# Altium PCB Blinking_LED.PcbDoc
Units mil, origin at the board's own origin, x right, y up, seen from the top; angles counter-clockwise.
Board outline 1525 x 1300 mil, 2 copper layers (Top Layer, Bottom Layer); 12 components, 8 nets, 29 pads, 0 vias.
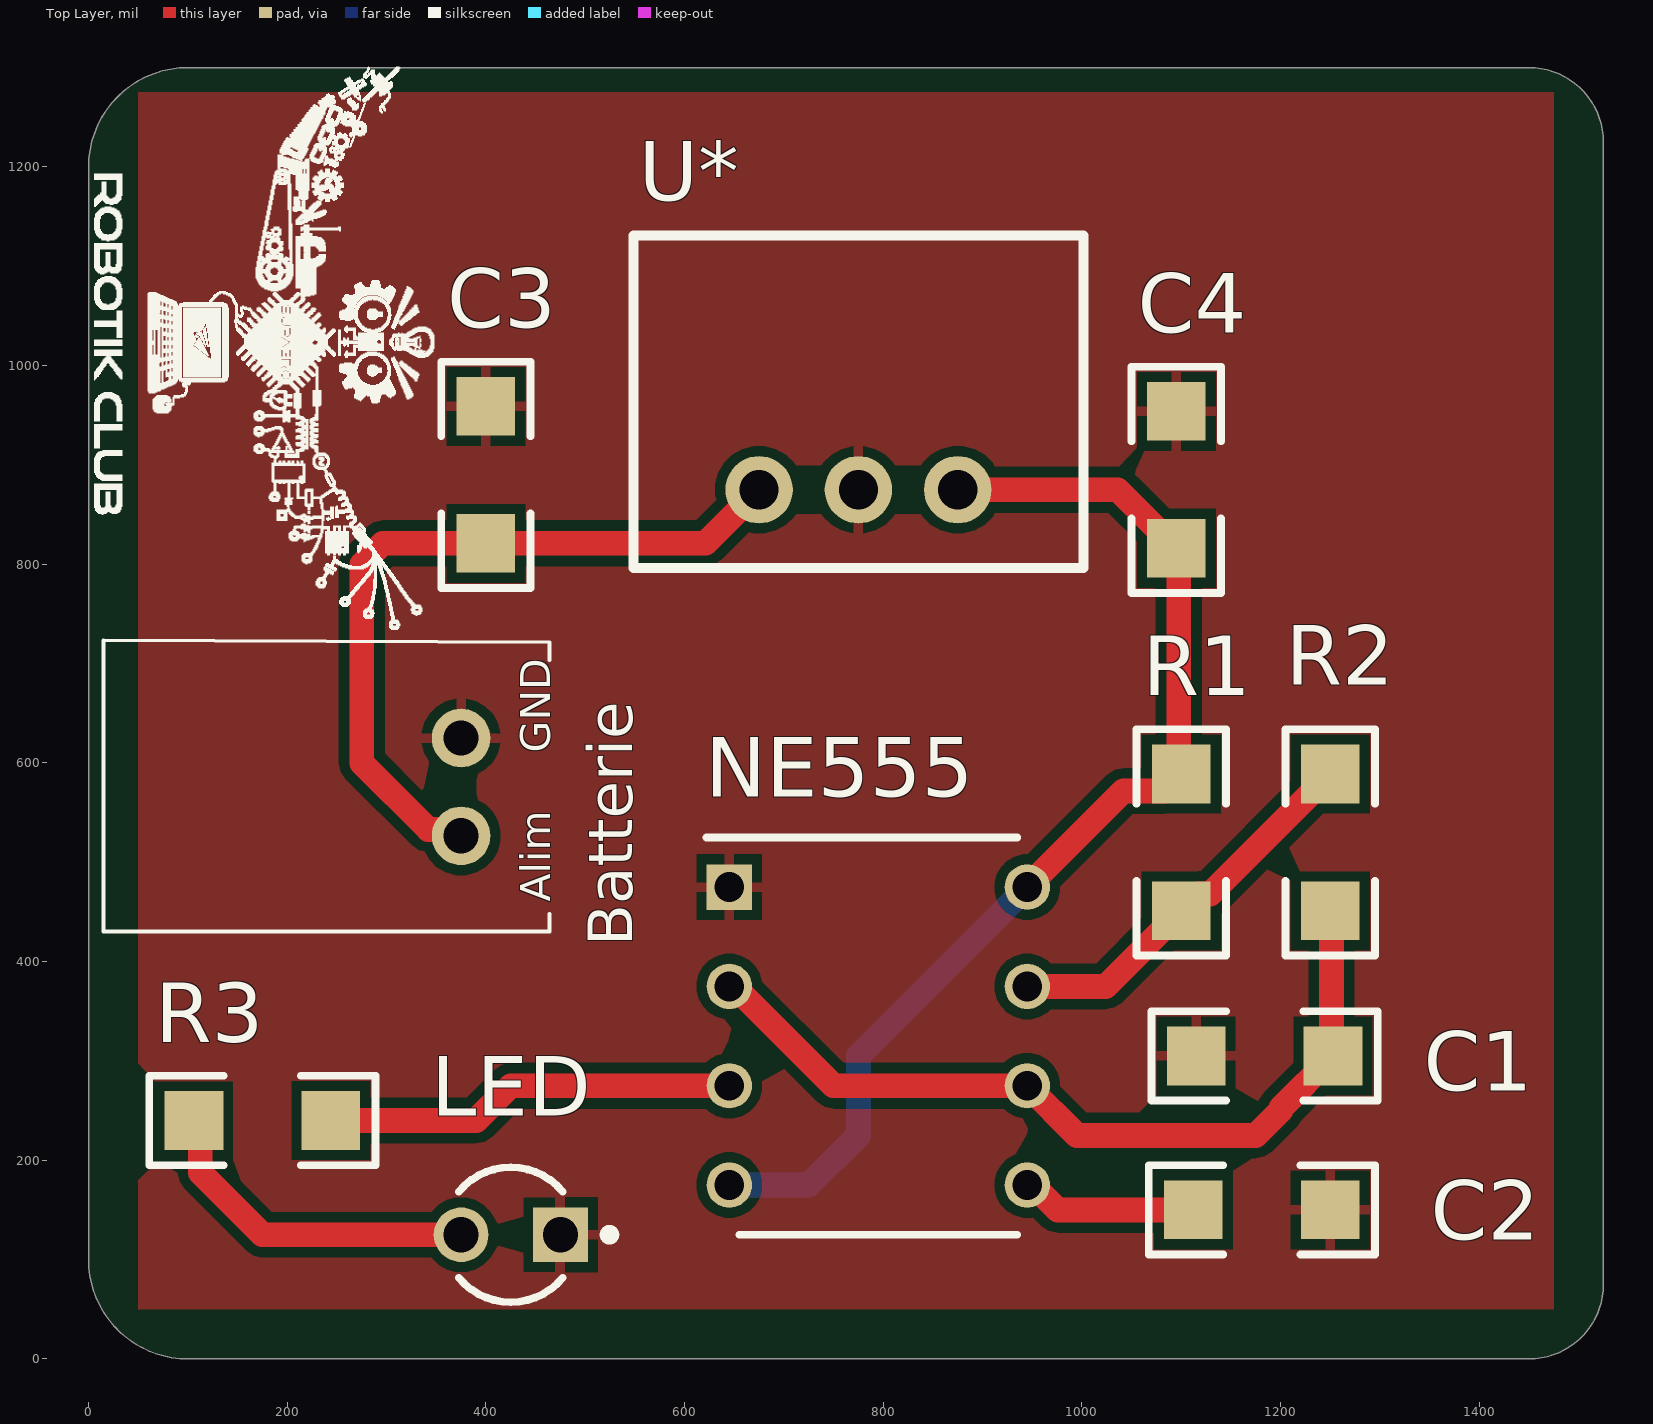
[diagram p0: Top Layer view]
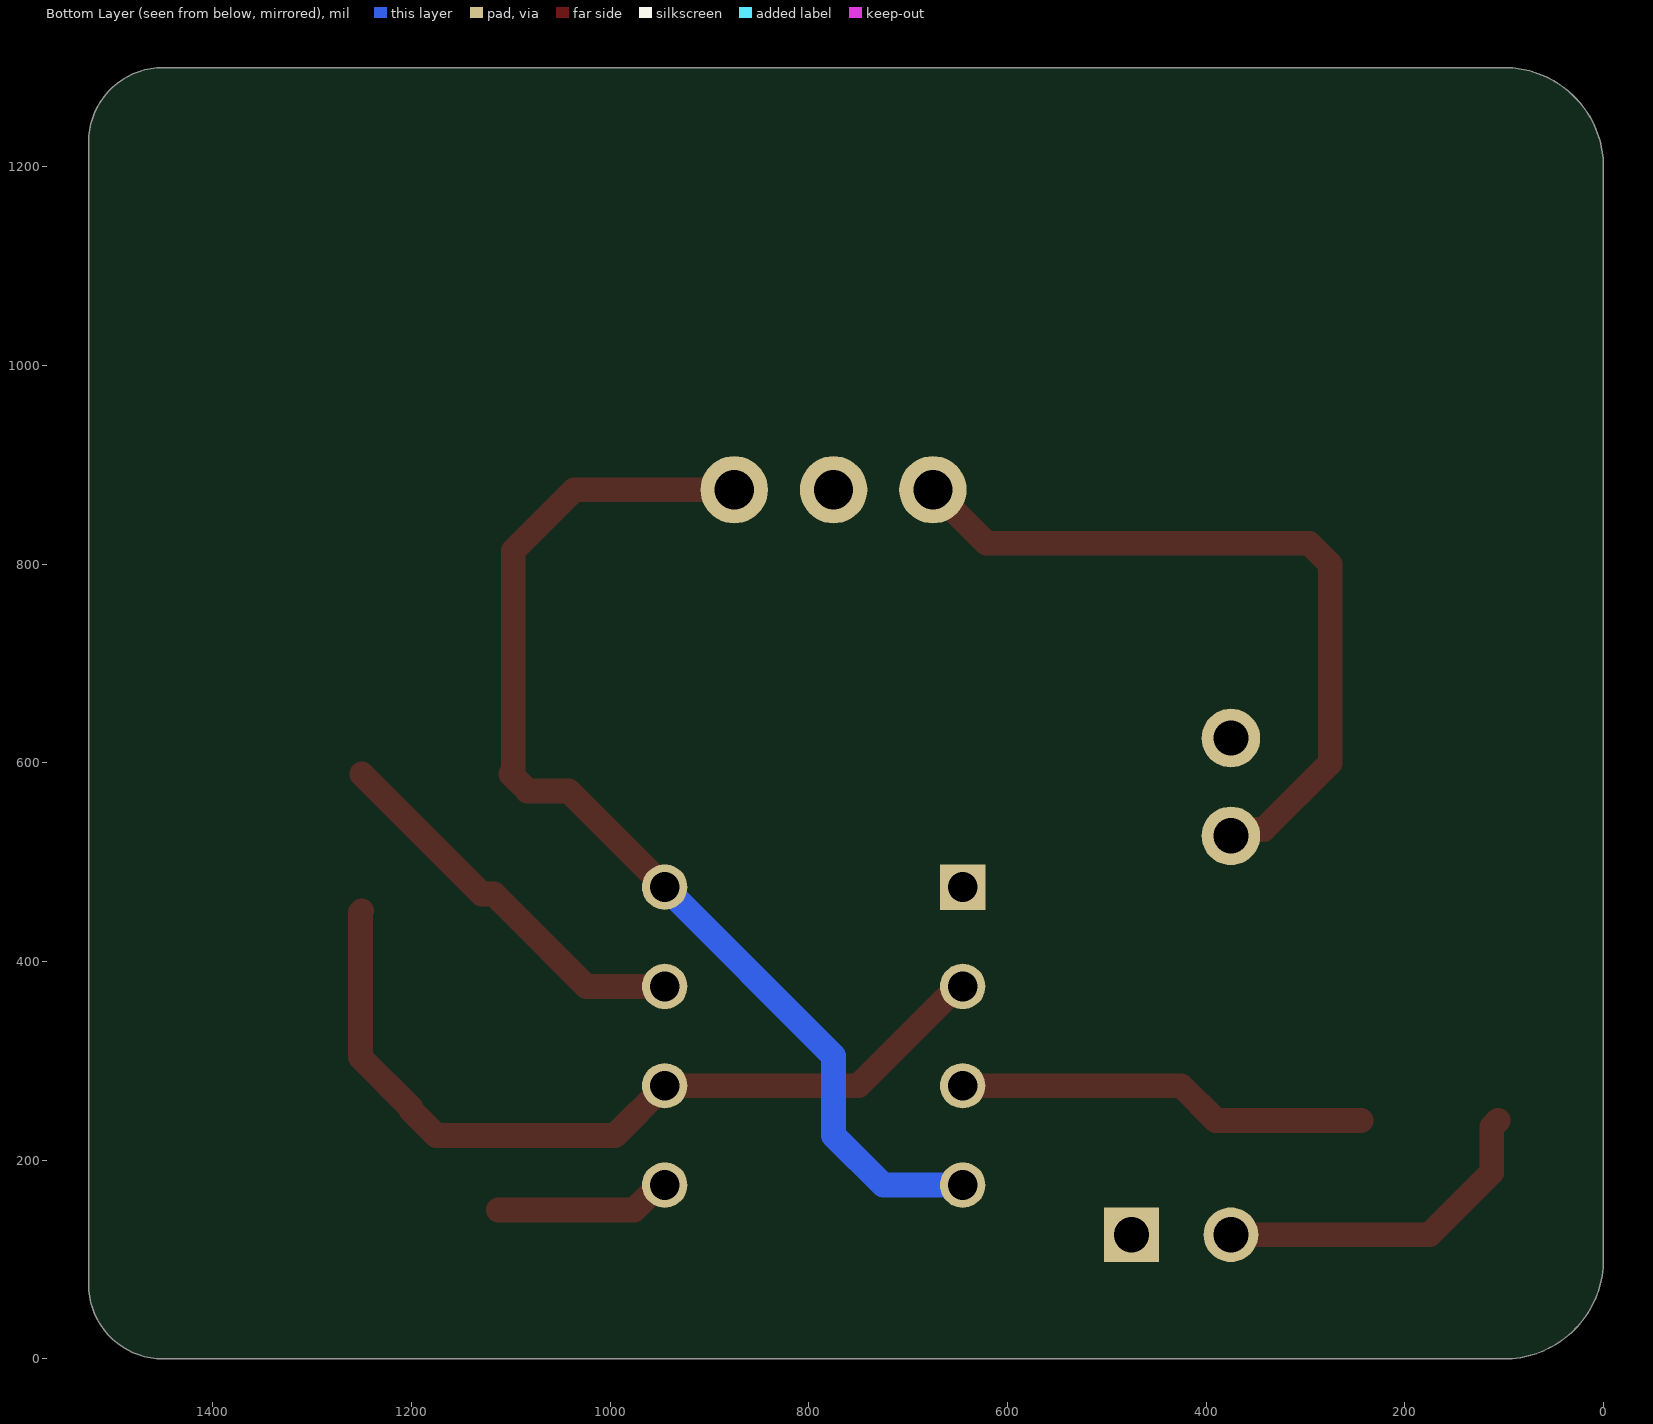
[diagram p1: Bottom Layer view, seen from below]
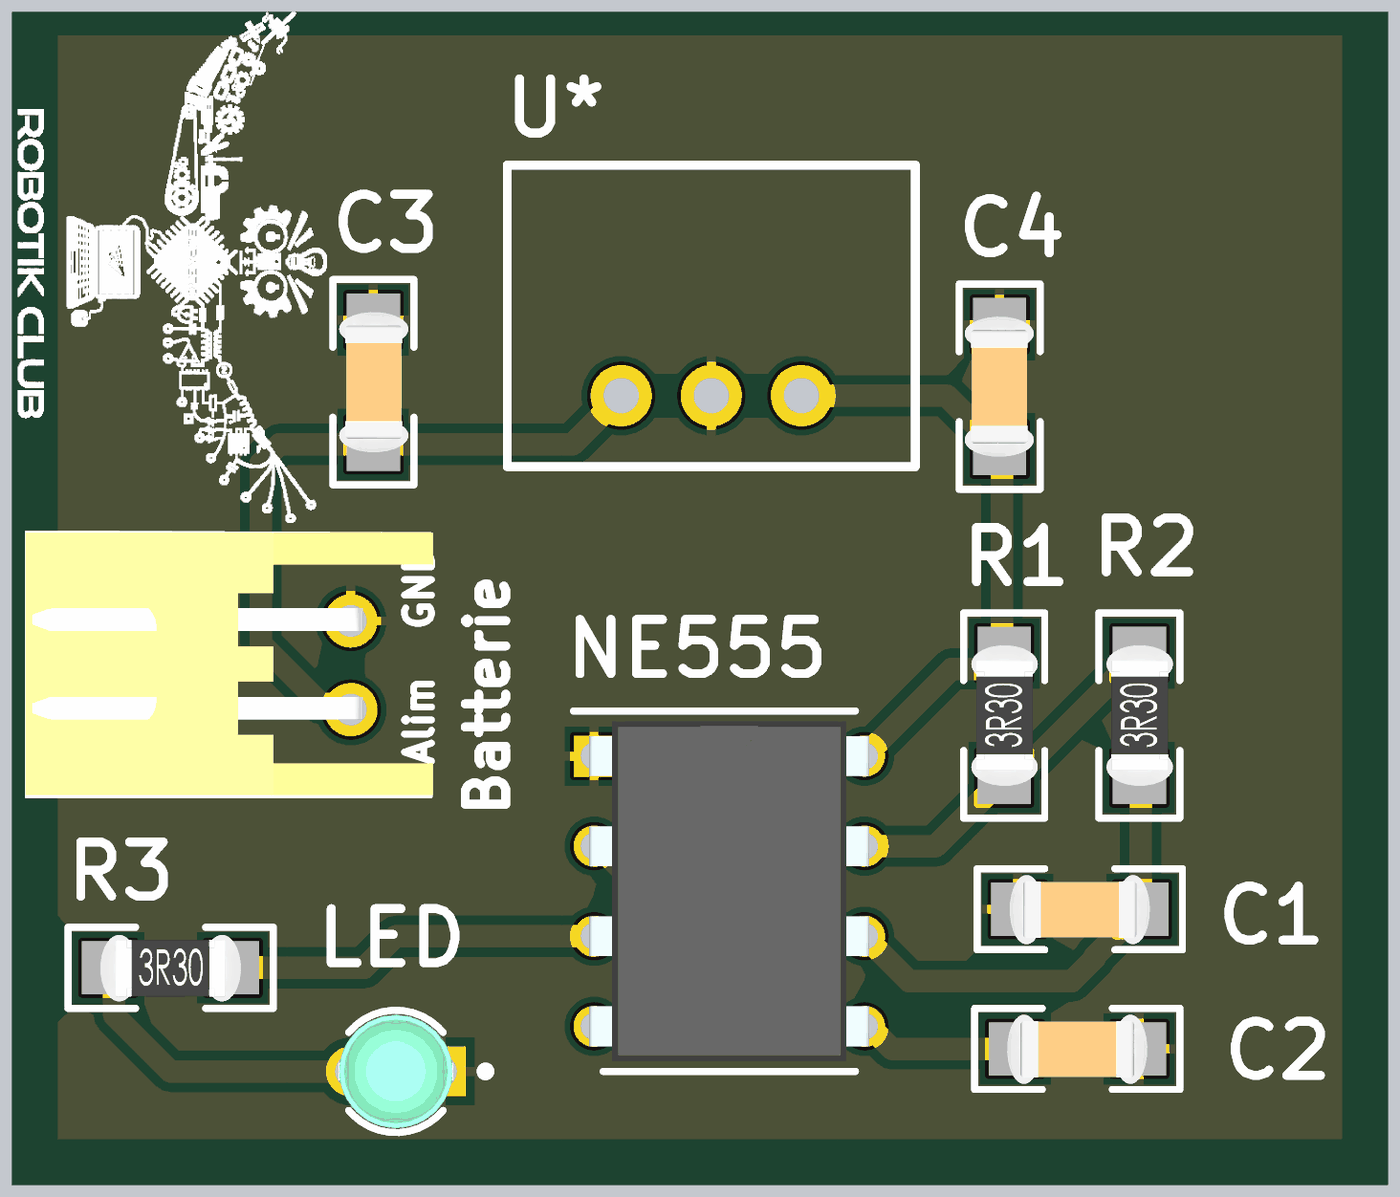
[diagram p2: 3D render of the assembled board from above, using the file's embedded part models]

## Layer stack, top to bottom
Top Solder: solder mask 0.4, Solder Resist, Dk 3.5
Top Layer: signal copper 1.4
Dielectric 1: dielectric 12.6, FR-4, Dk 4.8
Bottom Layer: signal copper 1.4
Bottom Solder: solder mask 0.4, Solder Resist, Dk 3.5

## Board outline
0,100 0,1200 cw(c100,1200) 100,1300 1450,1300 cw(c1450,1225) 1525,1225 1525,75 cw(c1450,75) 1450,0 100,0 cw(c100,100)

## Design rules (kind name [scope] priority, off if disabled: settings)
Clearance [All] p1: gap=10 ignorepadtopadclearanceinfootprint=FALSE
PolygonConnect [All] p1: connectstyle=Relief reliefconductorwidth=10 reliefentries=4 polygonreliefangle="90 Angle" airgapwidth=10
RoutingVias [All] p1: holewidth=28 width=50 viastyle="Through Hole" minholewidth=28 minwidth=50 maxholewidth=28 maxwidth=50
SolderMaskExpansion [All] p1: expansion=4 istentingtop=FALSE
SupplyNets "Schematic Supply Nets" [InNet('GND')] p1: voltage=0.000
Width [All] p1: maxlimit=50 minlimit=25 preferedwidth=25
30 further rules are at their usual default settings.

## Classes and differential pairs
component class Blinking_LED: Batterie C1 C2 C3 C4 LED NE555 R1 R2 R3 U*

## Components (designator, comment, footprint, x,y, rotation, side; value= is the part's Value field where it differs from the comment)
Batterie "S2B-XH-A-1_LF__SN_" S2B-XH-A 375,526.57 r90 top
C1 "Cap" "Capacitor 1206" 1183.9,305 r0 top value=10µF
C2 "Cap" "Capacitor 1206" 1181.1,150 r0 top value=10nF
C3 "Cap" "Capacitor 1206" 400,890 r90 top value=10µF
C4 "Cap" "Capacitor 1206" 1095,885 r270 top value=22µF
LED "WP710A10LGD" FP-WP710A10LGD-MFG 425,125 r180 top
NE555 "NE555N" DIP762W56P254L959H533Q8N 795,325 r0 top
R1 "Res2" "Resistor 1206" 1100,520 r90 top value=26K
R2 "Res2" "Resistor 1206" 1250,520 r90 top value=26K
R3 "Res2" "Resistor 1206" 175,240 r0 top value=392
U* "L78S12CV" R-78B 775,875 r180 top
? "Comment" Logo_lowres 200,1025 r270 top

## Footprints (in the part's own frame and the unit in brackets; to place one, negate y for a bottom-side part, rotate by r counter-clockwise, add the part's x,y. Pads: shape width x height; smd on the part's side, far side on the other; paste and mask are expansions set on the pad)
"Capacitor 1206" [mm]
  rect 1.5x1.5 smd: 1(-1.75,0) 2(1.75,0)
  silkscreen extent -2.89,-1.14 2.89,1.14, body extent -1.98,-0.99 1.98,0.96, height 1.3
DIP762W56P254L959H533Q8N [mm]
  rect 1.16x1.16 hole 0.76: 1(-3.81,3.81)
  round 1.16 hole 0.76: 2(-3.81,1.27) 3(-3.81,-1.27) 4(-3.81,-3.81) 5(3.81,-3.81) 6(3.81,-1.27) 7(3.81,1.27) 8(3.81,3.81)
  silkscreen extent -4.39,-5.08 3.55,5.08, body extent -3.95,-4.79 3.95,4.79, height 5.33
FP-WP710A10LGD-MFG [mm]
  rect 1.4x1.4 hole 0.9 paste-2539.97 mask+0: 1(-1.27,0)
  round 1.4 hole 0.9 paste-2539.97 mask+0: 2(1.27,0)
  silkscreen extent -2.65,-1.73 1.33,1.73, body extent -2.19,-2.19 2.19,2.19, height 0.25
Logo_lowres [mil]
  silkscreen extent -276,-194 291,148
R-78B [mm]
  round 1.724 hole 1: 1(-2.54,0) 2(0,0) 3(2.54,0)
  silkscreen extent -5.75,-6.5 5.75,2
"Resistor 1206" [mm]
  rect 1.5x1.5 smd: 1(-1.75,0) 2(1.75,0)
  silkscreen extent -2.89,-1.14 2.89,1.14, body extent -1.98,-0.95 1.98,0.93, height 0.55
S2B-XH-A [mm]
  round 1.5 hole 0.9: 1(0,0) 2(2.5,0)
  silkscreen extent -2.45,-2.26 5,9.14, body extent -2.41,-2.32 4.99,9.18, height 6.15

## Part data
Batterie: "Connector", Arrow Part Number=S2B-XH-A-1(LF)(SN), Manufacturer_Name="JST (JAPAN SOLDERLESS TERMINALS)", Datasheet Link=http://www.jst-mfg.com/product/pdf/eng/eXH.pdf, Height=6.1mm, Manufacturer_Part_Number=S2B-XH-A-1(LF)(SN)
C1 C2 C3 C4: "Capacitor", LatestRevisionDate=17-Jul-2002, LatestRevisionNote="Re-released for DXP Platform.", PackageDescription="Radial Cap, Thru-Hole; 2 Leads; 0.3 in Pin Spacing", PackageReference=RAD-0.3, Published=8-Jun-2000, Publisher="Altium Limited"
LED: library part CMP-00682-20090258-1, "WP710A10LGD LED Thru-Hole PCB Green T-1 3mm Green Lens 2 mA 568 nm 2 mcd Round", Case/Package=Radial, Color=Green, Forward Current=2mA, Forward Voltage=1.9V, Max Junction Temperature (Tj)=110°C, Max Operating Temperature=85°C, Min Operating Temperature=-40°C, Power Dissipation=62.5mW, Reverse Voltage=5V, Dominant Wavelength=568nm, Height=4.6mm, Illumination Color=Green, Lead Free="Lead Free", Lens Color=Green, Lens Style="Diffused, Dome, Round, Tinted", Luminous Intensity=2mcd, Mount="Through Hole", NexarPartId=20090258, Number of LEDs=1, Number of Pins=3, Power Rating=62.5mW, RoHS=Compliant, Schedule B="8541402000, 8541402000", Test Current=2mA, Viewing Angle=40°, Wavelength=568nm
NE555: "Integrated Circuit", Manufacturer_Name=HGSEMI, Datasheet Link=https://datasheet.lcsc.com/szlcsc/1906111919_HGSEMI-NE555N_C398063.pdf, Height=5.33mm, Manufacturer_Part_Number=NE555N
R1 R2 R3: "Resistor", LatestRevisionDate=17-Jul-2002, LatestRevisionNote="Re-released for DXP Platform.", PackageDescription="Axial Device, Thru-Hole; 2 Leads; 0.4 in Pin Spacing", PackageReference=AXIAL-0.4, Published=8-Jun-2000, Publisher="Altium Limited"
U*: library part "Régulateur de tension linéaire"

## Nets (pads, with @x,y where several pads share a name; then routed paths per layer and width w, separated by ;. In a path a pad name is that pad's centre, name@x,y a point inside that pad or via, vN(x,y) a via of type N, cw(c..) or ccw(c..) an arc to the next point about the centre after c; other vN are vias at no path point)
+5V: C4.2 NE555.4 NE555.8 R1.2 U*.1 | length 1147
  Top Layer w25: U*.1 1036.1,875 C4.2 1097.5,813.6 1097.5,591.4 R1.2 1082.97,571.87 1041.87,571.87 NE555.8
  Bottom Layer w25: NE555.4 725,175 775,225 775,305 NE555.8
Alim: Batterie.1 C3.1 U*.3 | length 761.5
  Top Layer w25: Batterie.1 368.48,533.09 341.91,533.09 275,600 275,800 296.1,821.1 C3.1 621.1,821.1 U*.3
Disch: NE555.7 R1.1 R2.2 | length 393.6
  Top Layer w25: NE555.7 1023.9,375 R1.1 1117.03,468.13 1129.23,468.13 R2.2
GND: Batterie.2 C1.1 C2.2 C3.2 C4.1 LED.1 NE555.1 U*.2
NetC2_1: C2.1 NE555.5 | length 177.6
  Top Layer w25: NE555.5 950.59,175 975.59,150 C2.1
NetLED_2: LED.2 R3.1 | length 343.5
  Top Layer w25: R3.1 112.38,233.72 112.38,187.62 175,125 LED.2
Output: NE555.3 R3.2 | length 415.6
  Top Layer w25: R3.2 390,240 425,275 NE555.3
Trig_Thres: C1.2 NE555.2 NE555.6 R2.1 | length 850.5
  Top Layer w25: NE555.2 650,375 750,275 NE555.6 995,225 1175,225 1200.41,250.41 1200.41,252.62 1251.4,303.6 1251.4,449.7 R2.1

## Polygon pours and split planes (outlines as drawn)
GND on Top Layer "GND_L01_P000" (solid, remove dead copper, pour order 0): 50,50 1475,50 1475,1275 50,1275

## Silkscreen, mask and mechanical layers (free items; w line width, h text height)
Top Overlay:
  text "GND" at 465,610 h30 r90
  text "Alim" at 465,460 h30 r90